# Altium PCB Pet_Tracker_main_board.PcbDoc
Units mil, origin at the board's own origin, x right, y up, seen from the top; angles counter-clockwise.
Board outline 1653.54 x 1771.65 mil, 4 copper layers (Top Layer, Mid Layer 1, Mid Layer 2, Bottom Layer), stack 23.756 mil thick; 49 components, 52 nets, 242 pads, 474 vias.
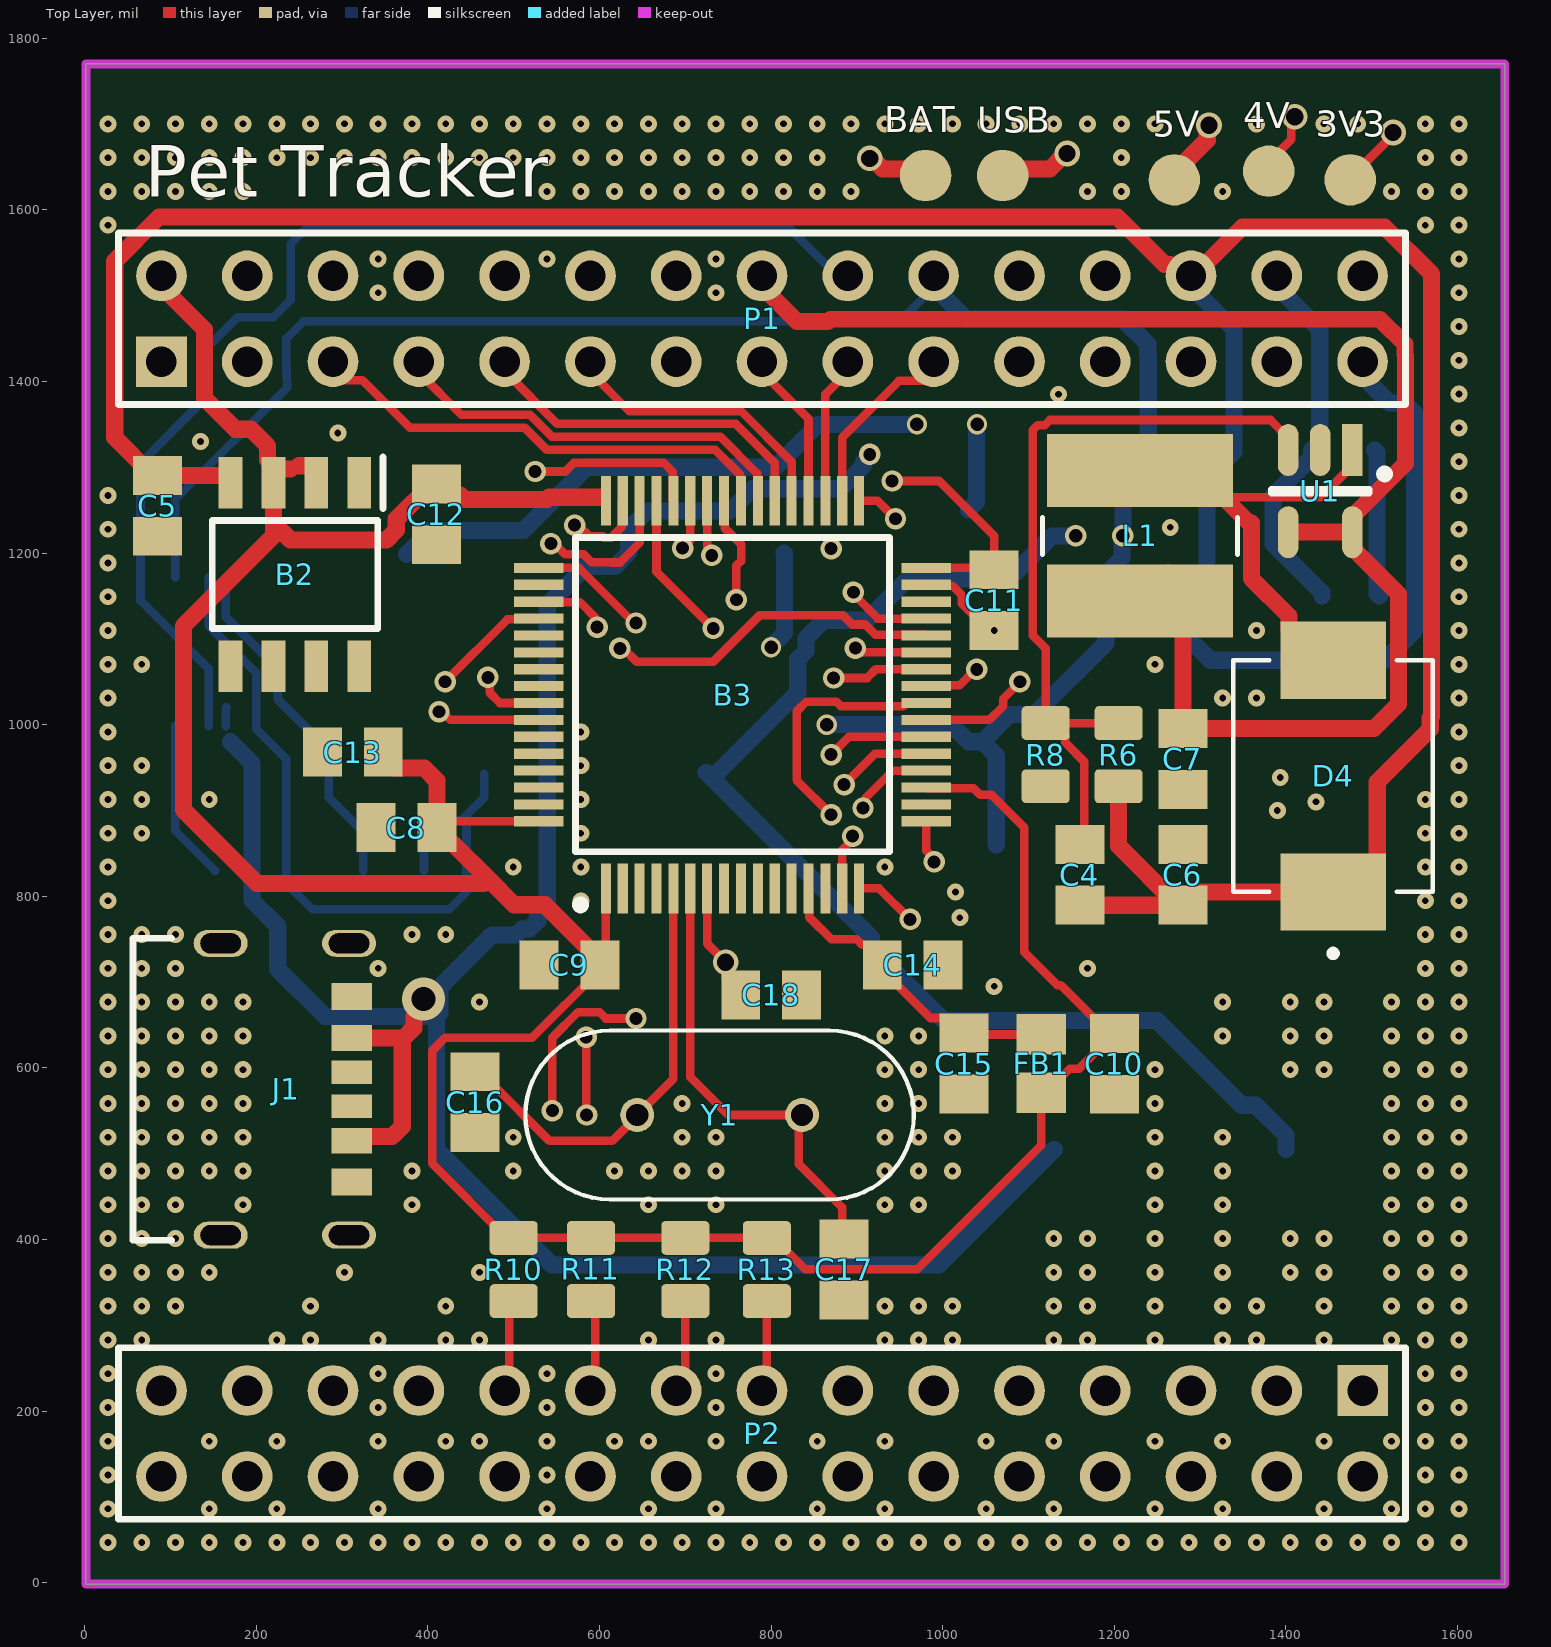
[diagram p0: Top Layer view]
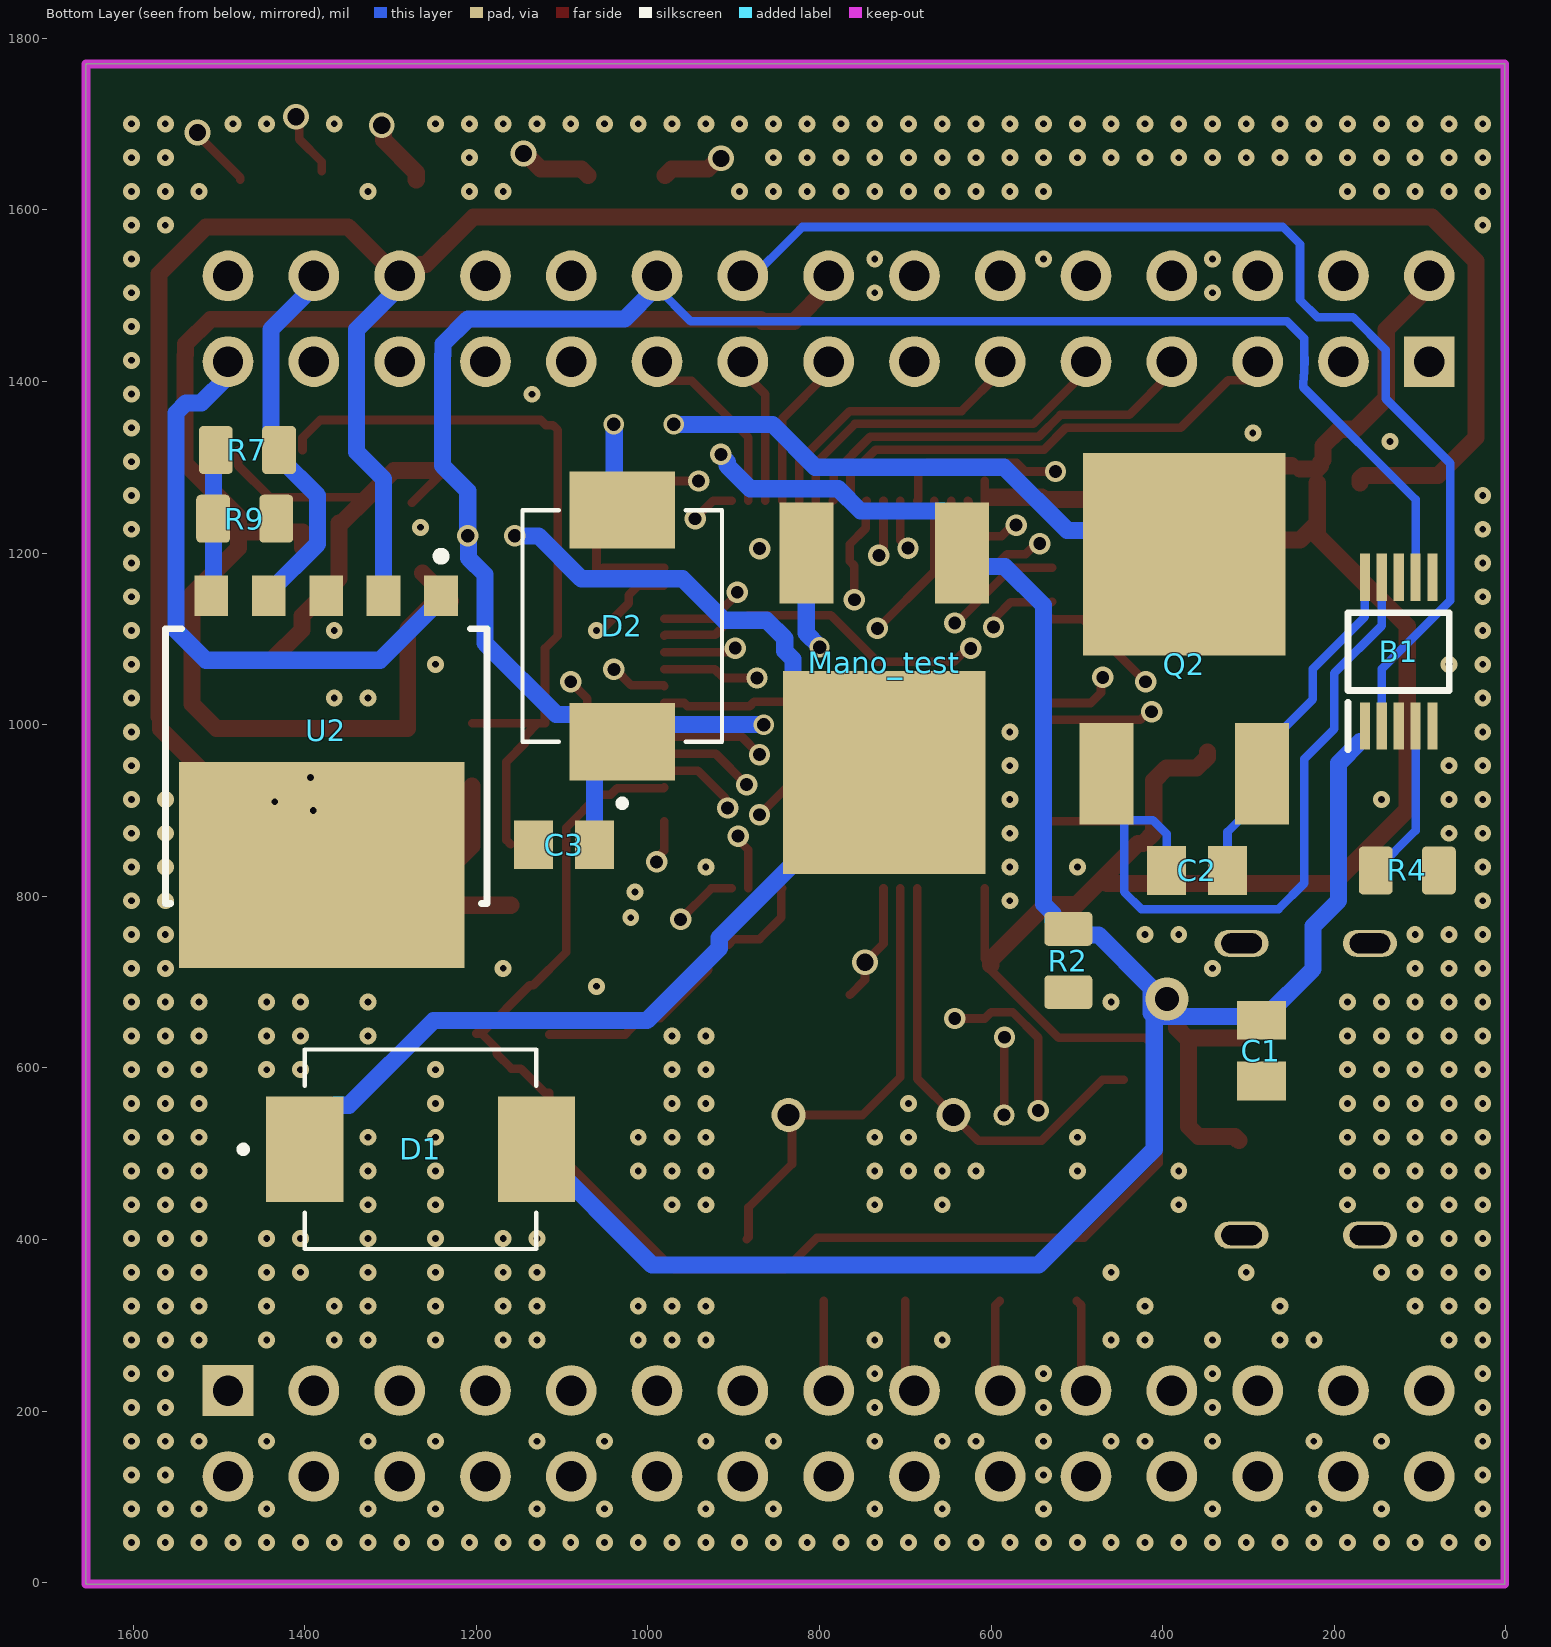
[diagram p1: Bottom Layer view, seen from below]
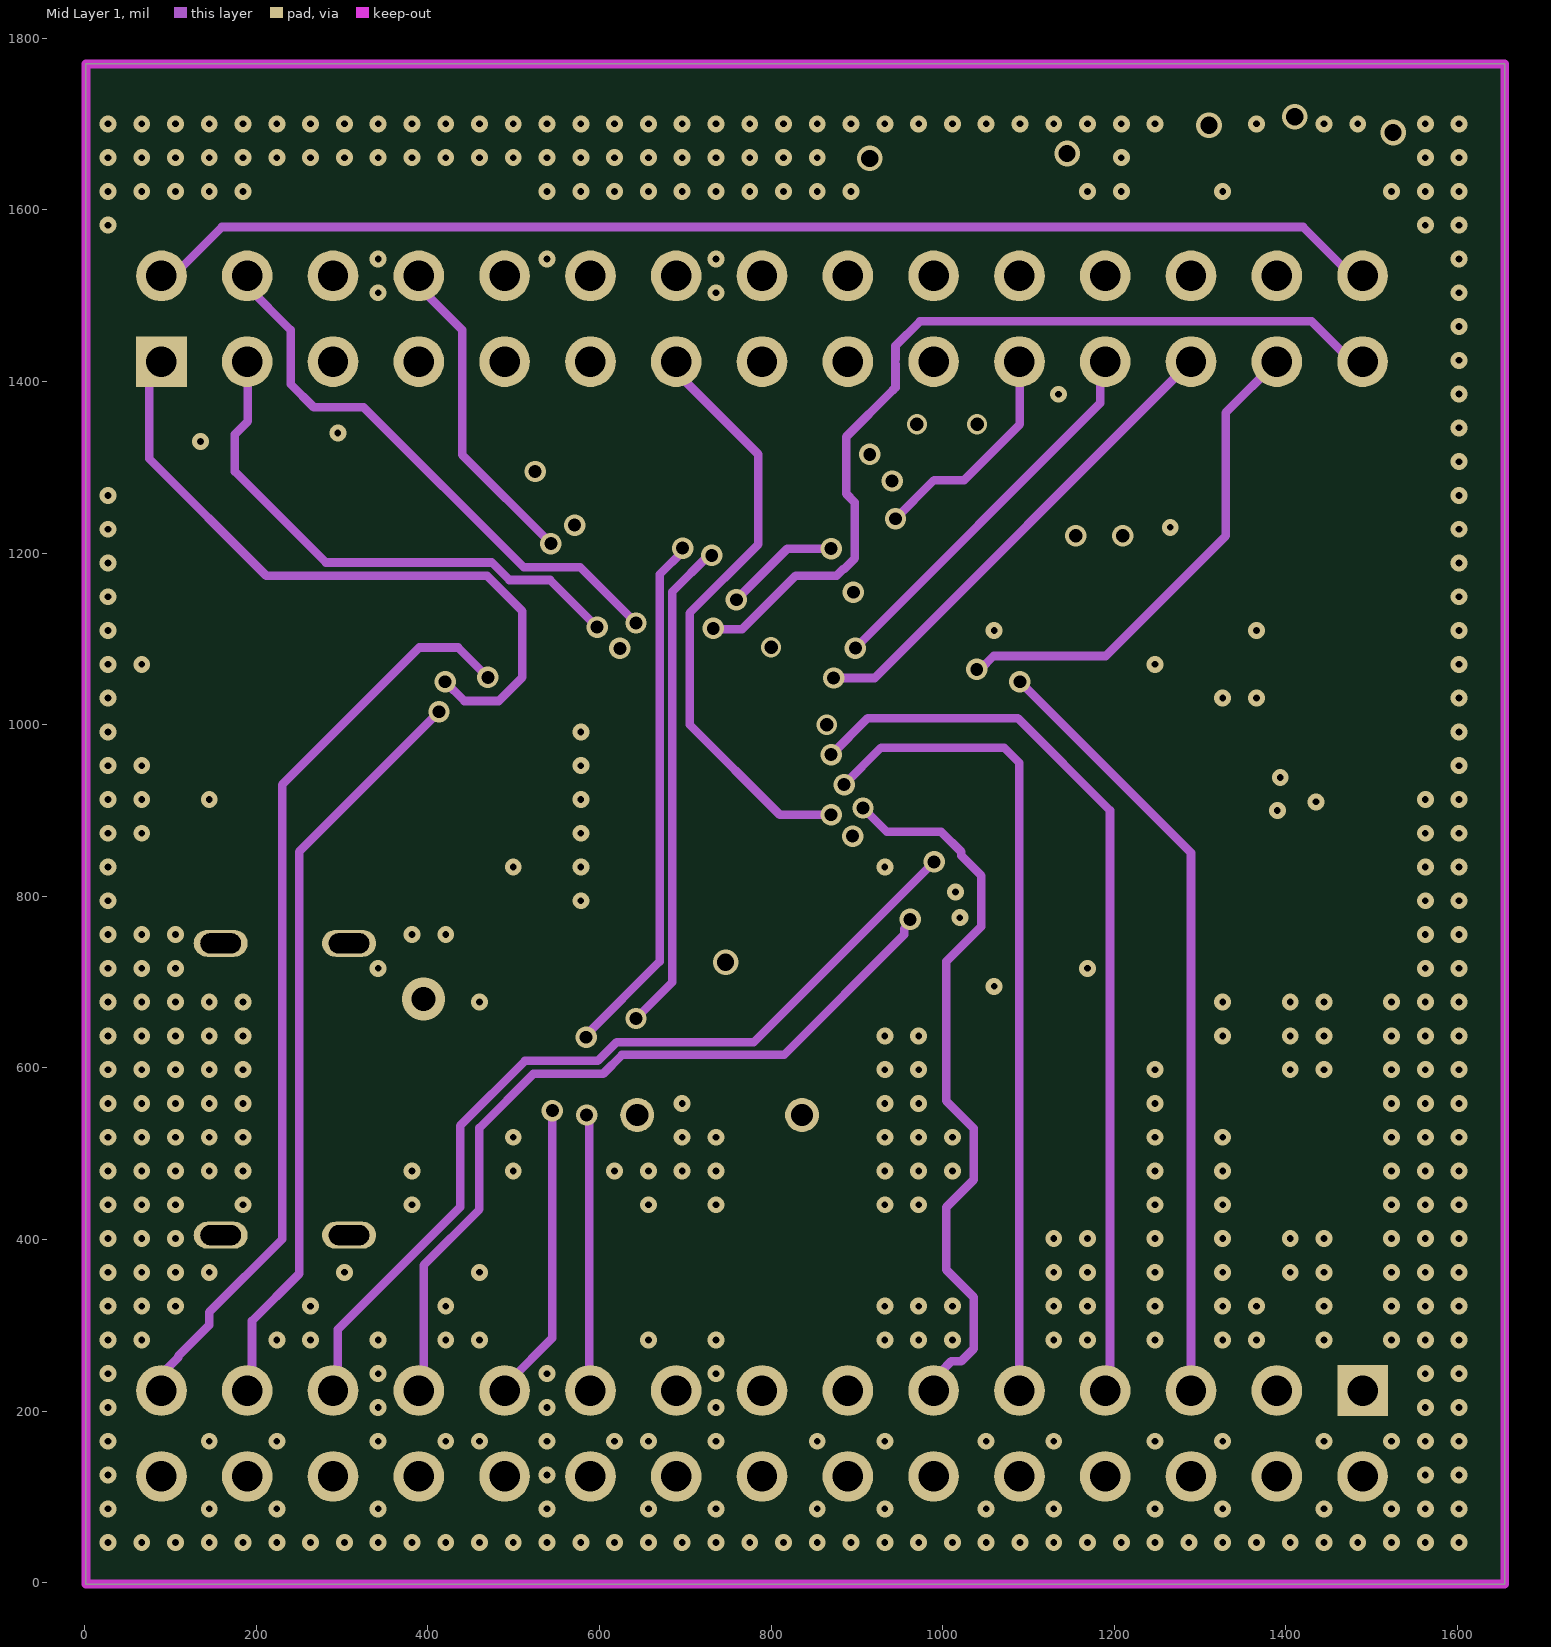
[diagram p2: Mid Layer 1]
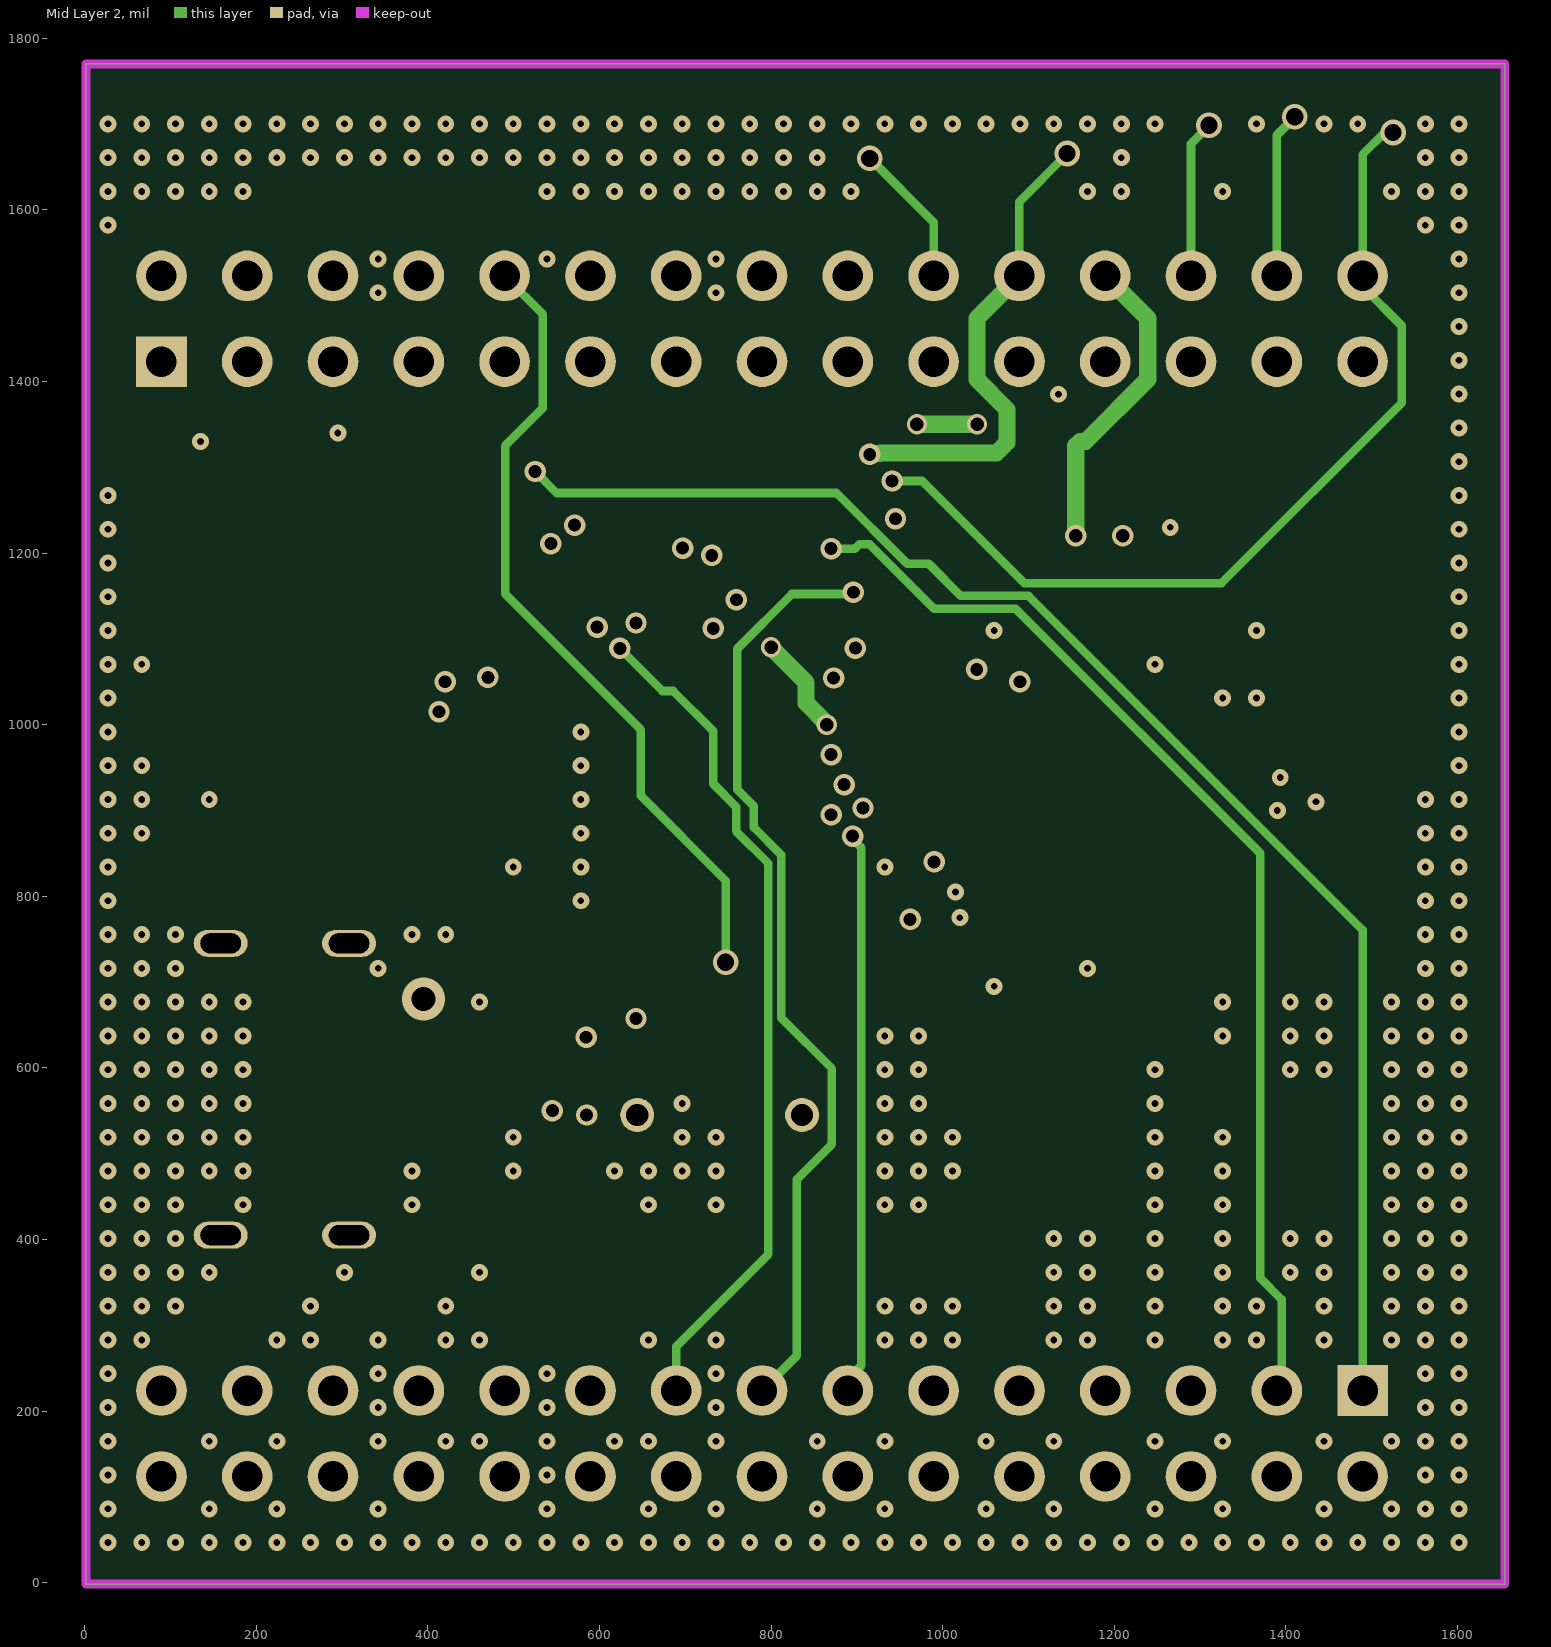
[diagram p3: Mid Layer 2]

## Layer stack, top to bottom
Top Solder: solder mask 0.4, Solder Resist, Dk 3.5
Top Layer: signal copper 1.4
Dielectric 1: prepreg 2.8, PP-006, Dk 4.1
Mid Layer 1: signal copper 1.378
Dielectric 2: prepreg 2.8, PP-006, Dk 4.1
Mid Layer 2: signal copper 1.378
Dielectric2: dielectric 12.6, FR-4, Dk 4.8
Bottom Layer: signal copper 1.4
Bottom Solder: solder mask 0.4, Solder Resist, Dk 3.5

## Board outline
1.46,-1.65 1.46,1770 1655,1770 1655,-1.65

## Design rules (kind name [scope] priority, off if disabled: settings)
AssemblyTestPointUsage [All] p0: scope1count=1 scope1_0_kind=Board scope1_0_value=Board scope2count=1 scope2_0_kind=Board scope2_0_value=Board commentlength=0
AssemblyTestpoint [All] p0: scope1count=1 scope1_0_kind=Board scope1_0_value=Board scope2count=1 scope2_0_kind=Board scope2_0_value=Board commentlength=0
Clearance [All] p0: scope1count=1 scope1_0_kind=Board scope1_0_value=Board scope2count=1 scope2_0_kind=Board scope2_0_value=Board commentlength=0 gap=10
Clearance [All] p1: gap=10 ignorepadtopadclearanceinfootprint=FALSE except(0: Arc-Hole Track-Hole SMDPad-Hole THPad-Hole Via-Hole Fill-Hole Poly-Hole Region-Hole Text-Hole; 5: Arc-Arc Arc-Track Arc-SMDPad Arc-Text Track-Track Track-SMDPad Track-Text SMDPad-SMDPad SMDPad-Text THPad-Text Via-Text Fill-Text Poly-Text Region-Text Text-Text)
ComponentClearance [All] p0: scope1count=1 scope1_0_kind=Board scope1_0_value=Board scope2count=1 scope2_0_kind=Board scope2_0_value=Board commentlength=0 gap=10 collisioncheckmode=3
DiffPairsRouting [All] p0: scope1count=1 scope1_0_kind=Board scope1_0_value=Board scope2count=1 scope2_0_kind=Board scope2_0_value=Board commentlength=0
FabricationTestPointUsage [All] p0: scope1count=1 scope1_0_kind=Board scope1_0_value=Board scope2count=1 scope2_0_kind=Board scope2_0_value=Board commentlength=0 valid=0 allowmultiple=FALSE
FabricationTestpoint [All] p0: scope1count=1 scope1_0_kind=Board scope1_0_value=Board scope2count=1 scope2_0_kind=Board scope2_0_value=Board commentlength=0 side=3 testpointundercomponent=TRUE minsize=40 maxsize=100 preferedsize=60 minholesize=0 maxholesize=40 preferedholesize=32 testpointgrid=1
FanoutControl Fanout_BGA [All] p0 off: scope1count=1 scope1_0_kind=Board scope1_0_value=Board scope2count=1 scope2_0_kind=Board scope2_0_value=Board commentlength=69 // Protel DXP Scope 1 Expression Was: IsBGA   Fanout_BGA (Default Rule)
FanoutControl Fanout_LCC [All] p0 off: scope1count=1 scope1_0_kind=Board scope1_0_value=Board scope2count=1 scope2_0_kind=Board scope2_0_value=Board commentlength=69 // Protel DXP Scope 1 Expression Was: IsLCC   Fanout_LCC (Default Rule)
FanoutControl Fanout_SOIC [All] p0 off: scope1count=1 scope1_0_kind=Board scope1_0_value=Board scope2count=1 scope2_0_kind=Board scope2_0_value=Board commentlength=71 // Protel DXP Scope 1 Expression Was: IsSOIC   Fanout_SOIC (Default Rule)
FanoutControl Fanout_Small [All] p0 off: scope1count=1 scope1_0_kind=Board scope1_0_value=Board scope2count=1 scope2_0_kind=Board scope2_0_value=Board commentlength=84 // Protel DXP Scope 1 Expression Was: (CompPinCount < 5)   Fanout_Small (Default Rule)
FanoutControl Fanout_Default [All] p0: scope1count=1 scope1_0_kind=Board scope1_0_value=Board scope2count=1 scope2_0_kind=Board scope2_0_value=Board commentlength=30 // Fanout_Default (Default Rule)
Height [All] p0: scope1count=1 scope1_0_kind=Board scope1_0_value=Board scope2count=1 scope2_0_kind=Board scope2_0_value=Board commentlength=0
HoleSize [All] p0: scope1count=1 scope1_0_kind=Board scope1_0_value=Board scope2count=1 scope2_0_kind=Board scope2_0_value=Board commentlength=0 absolutevalues=TRUE maxlimit=100 minlimit=1 maxpercent=80.000 minpercent=20.000
HoleToHoleClearance [All] p0: scope1count=1 scope1_0_kind=Board scope1_0_value=Board scope2count=1 scope2_0_kind=Board scope2_0_value=Board commentlength=0
LayerPairs [All] p0: scope1count=1 scope1_0_kind=Board scope1_0_value=Board scope2count=1 scope2_0_kind=Board scope2_0_value=Board commentlength=0 enforce=TRUE
MinimumSolderMaskSliver [All] p0: scope1count=1 scope1_0_kind=Board scope1_0_value=Board scope2count=1 scope2_0_kind=Board scope2_0_value=Board commentlength=0
MinimumSolderMaskSliver [All] p1: minsoldermaskwidth=1.5
NetAntennae [All] p0: scope1count=1 scope1_0_kind=Board scope1_0_value=Board scope2count=1 scope2_0_kind=Board scope2_0_value=Board commentlength=0
PasteMaskExpansion [All] p0: scope1count=1 scope1_0_kind=Board scope1_0_value=Board scope2count=1 scope2_0_kind=Board scope2_0_value=Board commentlength=0 expansion=0
PlaneClearance [All] p0: scope1count=1 scope1_0_kind=Board scope1_0_value=Board scope2count=1 scope2_0_kind=Board scope2_0_value=Board commentlength=0 clearance=20
PlaneConnect [All] p0: scope1count=1 scope1_0_kind=Board scope1_0_value=Board scope2count=1 scope2_0_kind=Board scope2_0_value=Board commentlength=0 planeconnectstyle=Relief reliefexpansion=10 reliefentries=4 reliefconductorwidth=5.91 reliefairgap=10
PlaneConnect [All] p1: pad.planeconnectstyle=Relief pad.reliefexpansion=10 pad.reliefentries=4 pad.reliefconductorwidth=5.91 pad.reliefairgap=10 via.planeconnectstyle=Relief via.reliefexpansion=20 via.reliefentries=4 via.reliefconductorwidth=10 via.reliefairgap=10
PolygonConnect PolygonConnect_1 [All] p0: scope1count=1 scope1_0_kind=Board scope1_0_value=Board scope2count=1 scope2_0_kind=Board scope2_0_value=Board commentlength=0 connectstyle=Relief reliefconductorwidth=10 reliefentries=4 polygonreliefangle="90 Angle"
PolygonConnect VIA_COnnect [All] p0 off: scope1count=1 scope1_0_kind=Board scope1_0_value=Board scope2count=1 scope2_0_kind=Net scope2_0_value=GND commentlength=44 connectstyle=Relief reliefconductorwidth=10 reliefentries=4 polygonreliefangle="90 Angle" // Protel DXP Scope 1 Expression Was: IsVia
PolygonConnect VIA_COnnect [IsVia vs InNet('GND')] p1: thpad.connectstyle=Relief thpad.reliefconductorwidth=10 thpad.reliefentries=4 thpad.polygonreliefangle="90 Angle" thpad.airgapwidth=10 smdpad.connectstyle=Relief smdpad.reliefconductorwidth=10 smdpad.reliefentries=4 smdpad.polygonreliefangle="90 Angle" smdpad.airgapwidth=10 via.connectstyle=Direct via.reliefconductorwidth=10 via.reliefentries=4 via.polygonreliefangle="90 Angle" via.airgapwidth=10
PolygonConnect PolygonConnect_1 [All] p2: thpad.connectstyle=Relief thpad.reliefconductorwidth=10 thpad.reliefentries=4 thpad.polygonreliefangle="90 Angle" thpad.airgapwidth=10 smdpad.connectstyle=Relief smdpad.reliefconductorwidth=5.91 smdpad.reliefentries=4 smdpad.polygonreliefangle="90 Angle" smdpad.airgapwidth=10 via.connectstyle=Relief via.reliefconductorwidth=10 via.reliefentries=4 via.polygonreliefangle="90 Angle" via.airgapwidth=10
RoutingCorners [All] p0: scope1count=1 scope1_0_kind=Board scope1_0_value=Board scope2count=1 scope2_0_kind=Board scope2_0_value=Board commentlength=0 cornerstyle=45-Degree minsetback=100 maxsetback=100
RoutingLayers [All] p0: scope1count=1 scope1_0_kind=Board scope1_0_value=Board scope2count=1 scope2_0_kind=Board scope2_0_value=Board commentlength=0 top layer=Automatic mid layer 1=Automatic mid layer 2=Automatic bottom layer=Automatic
RoutingPriority [All] p0: scope1count=1 scope1_0_kind=Board scope1_0_value=Board scope2count=1 scope2_0_kind=Board scope2_0_value=Board commentlength=0
RoutingTopology [All] p0: scope1count=1 scope1_0_kind=Board scope1_0_value=Board scope2count=1 scope2_0_kind=Board scope2_0_value=Board commentlength=0 topology=Shortest
RoutingVias [All] p0: scope1count=1 scope1_0_kind=Board scope1_0_value=Board scope2count=1 scope2_0_kind=Board scope2_0_value=Board commentlength=0 holewidth=28 width=50 viastyle="Through Hole" minholewidth=5.91 minwidth=9.84 maxholewidth=39.37 maxwidth=59.06
RoutingVias [All] p1: holewidth=28 width=50 viastyle="Through Hole" minholewidth=5.91 minwidth=9.84 maxholewidth=39.37 maxwidth=59.06
ShortCircuit [All] p0: scope1count=1 scope1_0_kind=Board scope1_0_value=Board scope2count=1 scope2_0_kind=Board scope2_0_value=Board commentlength=0 allowed=FALSE
SilkToBoardRegionClearance [All] p0: scope1count=1 scope1_0_kind=Board scope1_0_value=Board scope2count=1 scope2_0_kind=Board scope2_0_value=Board commentlength=0
SilkToSilkClearance [All] p0: scope1count=1 scope1_0_kind=Board scope1_0_value=Board scope2count=1 scope2_0_kind=Board scope2_0_value=Board commentlength=0
SilkToSolderMaskClearance [All] p0 off: scope1count=1 scope1_0_kind=Board scope1_0_value=Board scope2count=1 scope2_0_kind=Board scope2_0_value=Board commentlength=44 // Protel DXP Scope 1 Expression Was: IsPad
SilkToSolderMaskClearance [IsPad] p1: minsilkscreentomaskgap=5 clearancetoexposedcopper=TRUE
SolderMaskExpansion [All] p0: scope1count=1 scope1_0_kind=Board scope1_0_value=Board scope2count=1 scope2_0_kind=Board scope2_0_value=Board commentlength=0 expansion=1.5
SolderMaskExpansion [All] p1: expansion=1.5 istentingtop=FALSE
UnRoutedNet [All] p0: scope1count=1 scope1_0_kind=Board scope1_0_value=Board scope2count=1 scope2_0_kind=Board scope2_0_value=Board commentlength=0
UnpouredPolygon [All] p0: scope1count=1 scope1_0_kind=Board scope1_0_value=Board scope2count=1 scope2_0_kind=Board scope2_0_value=Board commentlength=0
Width [All] p0: scope1count=1 scope1_0_kind=Board scope1_0_value=Board scope2count=1 scope2_0_kind=Board scope2_0_value=Board commentlength=0 maxlimit=39.37 minlimit=10 preferedwidth=10
Width [All] p1: maxlimit=39.37 minlimit=10 preferedwidth=10
27 further rules are at their usual default settings.

## Classes and differential pairs
component class STM: B3 C8 C9 C10 C11 C12 C13 C14 C15 C16 C17 C18 FB1 P2 R10 R11 R12 R13 Y1
component class Power_Schematic: 3V3 4V 5V B1 B2 BAT C1 C2 C3 C4 C5 C6 C7 D1 D2 D4 J1 L1 Q2 R2 R4 R6 R7 R8 R9 U1 U2 USB

## Components (designator, comment, footprint, x,y, rotation, side; value= is the part's Value field where it differs from the comment)
3V3 "T_P_3V3" T_P 1475,1635 r90 top net-tie (schematic designator TP_3V3)
4V "T_P_4V" T_P 1380,1645 r180 top net-tie (schematic designator TP_4V)
5V "T_P_5V" T_P 1270,1635 r180 top net-tie (schematic designator TP_5V)
B1 "MAX1898EUB42+" MAX1898EUB42 125,1085 r90 bottom
B2 "MC33269D-3.3G" 3V3Voltage_MC33269D-3.3G 245,1175 r270 top
B3 "STM32L433RCT6P" STM32L433RCT6P 755,1035 r90 top
BAT "T_P_V_BAT" T_P 980,1640 r90 top net-tie (schematic designator TP_V_BAT?)
C1 "10uF" CAP_0805 285,620 r90 bottom
C2 "100nF" CAP_0805 360,830 r180 bottom
C3 "10uF" CAP_0805 1097.8,860 r180 bottom
C4 "4.7nF" CAP_0805 1160,825 r270 top
C5 "330nF" CAP_0805 85,1255 r90 top
C6 "10uF" CAP_0805 1280,825 r270 top
C7 "10uF" CAP_0805 1280,960 r90 top
C8 "100nF" CAP_0805 375,880 r0 top
C9 "100nF" CAP_0805 565,720 r0 top
C10 "100nF" CAP_0805 1200,604.57 r90 top
C11 "100nF" CAP_0805 1060,1145 r90 top
C12 "100nF" CAP_0805 410,1245 r90 top
C13 "1uF" CAP_0805 312.52,967.95 r0 top
C14 "1uF" CAP_0805 965,720 r180 top
C15 "10nF" CAP_0805 1025,605 r90 top
C16 "27pF" CAP_0805 455,560 r270 top
C17 "27pF" CAP_0805 885,365 r90 top
C18 "100nF" CAP_0805 800,685 r180 top
D1 "SS32" POWER_SCHOTKY_3A 1265,505 r180 bottom
D2 "SS32" POWER_SCHOTKY_3A 1030,1115.04 r90 bottom
D4 "SS32" POWER_SCHOTKY_3A 1455,940 r90 top
FB1 "120R" FER_BEAD_0805 1115,605 r90 top
J1 "POWER_USB" POWER_USB_C 190,575 r270 top
L1 "10uH" MCSD54-4R7MU 1230,1220 r270 top
Mano_test "MOSFET Pch -45V -4.5A" P_CHANNEL_POWER_RD3H045SPTL1 724.45,1032.68 r0 bottom
P1 "Header 15X2" HDR2X15 89.41,1423.03 r0 top
P2 "Header 15X2" HDR2X15 1489.41,223.82 r180 top
Q2 "MOSFET Pch -45V -4.5A" P_CHANNEL_POWER_RD3H045SPTL1 375,1110 r180 bottom
R2 "100k" RES_0805 510,725 r90 bottom
R4 "750" RES_0805 115,830 r180 bottom
R6 "100k" RES_0805 1205,965 r270 top
R7 "5.1k" RES_0805 1466.81,1320 r180 bottom
R8 "33k" RES_0805 1120,965 r90 top
R9 "2.2k" RES_0805 1470,1240 r0 bottom
R10 "4K7" RES_0805 500,365 r90 top
R11 "4K7" RES_0805 590,365 r90 top
R12 "4K7" RES_0805 700,365 r90 top
R13 "4K7" RES_0805 795,365 r90 top
U1 "Switch Voltage Regulator MIC2250-1YD5-TR" Switching_MIC2250-1YD5-TR 1440,1272.15 r270 top
U2 "1.24V-5V MIC37252WR" 1V24_5V_MIC37252WR 1375,961.61 r0 bottom
USB "T_P_USB" T_P 1070,1640 r90 top net-tie (schematic designator TP_USB)
Y1 "16MHZ_TL" 16MHZ_TL 740,545 r180 top

## Footprints (in the part's own frame and the unit in brackets; to place one, negate y for a bottom-side part, rotate by r counter-clockwise, add the part's x,y. Pads: shape width x height; smd on the part's side, far side on the other; paste and mask are expansions set on the pad)
1V24_5V_MIC37252WR [mm]
  rect 1x1.2 smd paste+0 mask+0: 1(-3.4,-4.785) 2(-1.7,-4.785) 3(0,-4.785) 4(1.7,-4.785) 5(3.4,-4.785)
  rect 8.45x6.096 smd paste-1000 mask+0: 6(0.127,3.175)
  silkscreen extent -4.76,-6.08 4.76,4.32
3V3Voltage_MC33269D-3.3G [mm]
  rect 1.525x0.7 smd: 1(-2.712,1.905) 2(-2.712,0.635) 3(-2.712,-0.635) 4(-2.712,-1.905) 5(2.712,-1.905) 6(2.712,-0.635) 7(2.712,0.635) 8(2.712,1.905)
  silkscreen extent -3.47,-2.45 1.6,2.61
16MHZ_TL [mm]
  round 1.007 hole 0.657: 1(-2.44,0) 2(2.44,0)
  silkscreen extent -5.75,-2.5 5.75,2.5
CAP_0805 [mm]
  rect 1.15x1.45 smd: 1(-0.9,0) 2(0.9,0)
FER_BEAD_0805 [mm]
  rect 1.2x1.47 smd: 1(-0.86,0) 2(0.86,0)
HDR2X15 [mm] "Connector; Header; 15x2 Position"
  rect 1.5x1.5 hole 0.9: 1(0,0)
  round 1.5 hole 0.9: 2(0,2.54) 3(2.54,0) 4(2.54,2.54) 5(5.08,0) 6(5.08,2.54) 7(7.62,0) 8(7.62,2.54) 9(10.16,0) 10(10.16,2.54) 11(12.7,0) 12(12.7,2.54) 13(15.24,0) 14(15.24,2.54) 15(17.78,0) 16(17.78,2.54) 17(20.32,0) 18(20.32,2.54) 19(22.86,0) 20(22.86,2.54) 21(25.4,0) 22(25.4,2.54) 23(27.94,0) 24(27.94,2.54) 25(30.48,0) 26(30.48,2.54) 27(33.02,0) 28(33.02,2.54) 29(35.56,0) 30(35.56,2.54)
  silkscreen extent -1.27,-1.27 36.83,3.81
MAX1898EUB42 [mm]
  rect 1.4x0.3 smd: 1(-2.2,1) 2(-2.2,0.5) 3(-2.2,0) 4(-2.2,-0.5) 5(-2.2,-1) 6(2.2,-1) 7(2.2,-0.5) 8(2.2,0) 9(2.2,0.5) 10(2.2,1)
  silkscreen extent -2.9,-1.5 1.15,1.5
MCSD54-4R7MU [mil]
  rect 85x217 smd paste+0 mask+0: 1(-76,0) 2(76,0)
  silkscreen extent -21,-114 21,114
P_CHANNEL_POWER_RD3H045SPTL1 [mm]
  rect 1.6x3 smd: 1(-2.3,-4.25) 3(2.3,-4.25)
  rect 6x6 smd: 2(0,2.25)
POWER_SCHOTKY_3A [mm]
  rect 2.29x3.12 smd: A(3.43,0) C(-3.43,0)
  silkscreen extent -5.35,-2.95 3.43,2.95
POWER_USB_C [mm]
  rect 0.7x1.2 smd: A5(-0.5,3.08) B5(0.5,3.08)
  rect 0.76x1.2 smd: A9(1.52,3.08) B9(-1.52,3.08)
  rect 0.8x1.2 smd: A12(2.75,3.08) B12(-2.75,3.08)
  oval 0.8x1.6 hole 0.6 slot 1.2 at 90 deg mask+0: S1(-4.32,3) S2(4.32,3) S3(-4.32,-0.8) S4(4.32,-0.8)
  silkscreen extent -4.47,-3.4 4.47,-2.25
RES_0805 [mm]
  rrect25% 1x1.42 smd: 1(-0.935,0) 2(0.935,0)
STM32L433RCT6P [mm]
  rect 1.475x0.3 smd: 1(-5.738,3.75) 2(-5.738,3.25) 3(-5.738,2.75) 4(-5.738,2.25) 5(-5.738,1.75) 6(-5.738,1.25) 7(-5.738,0.75) 8(-5.738,0.25) 9(-5.738,-0.25) 10(-5.738,-0.75) 11(-5.738,-1.25) 12(-5.738,-1.75) 13(-5.738,-2.25) 14(-5.738,-2.75) 15(-5.738,-3.25) 16(-5.738,-3.75) 33(5.738,-3.75) 34(5.738,-3.25) 35(5.738,-2.75) 36(5.738,-2.25) 37(5.738,-1.75) 38(5.738,-1.25) 39(5.738,-0.75) 40(5.738,-0.25) 41(5.738,0.25) 42(5.738,0.75) 43(5.738,1.25) 44(5.738,1.75) 45(5.738,2.25) 46(5.738,2.75) 47(5.738,3.25) 48(5.738,3.75)
  rect 0.3x1.475 smd: 17(-3.75,-5.738) 18(-3.25,-5.738) 19(-2.75,-5.738) 20(-2.25,-5.738) 21(-1.75,-5.738) 22(-1.25,-5.738) 23(-0.75,-5.738) 24(-0.25,-5.738) 25(0.25,-5.738) 26(0.75,-5.738) 27(1.25,-5.738) 28(1.75,-5.738) 29(2.25,-5.738) 30(2.75,-5.738) 31(3.25,-5.738) 32(3.75,-5.738) 49(3.75,5.738) 50(3.25,5.738) 51(2.75,5.738) 52(2.25,5.738) 53(1.75,5.738) 54(1.25,5.738) 55(0.75,5.738) 56(0.25,5.738) 57(-0.25,5.738) 58(-0.75,5.738) 59(-1.25,5.738) 60(-1.75,5.738) 61(-2.25,5.738) 62(-2.75,5.738) 63(-3.25,5.738) 64(-3.75,5.738)
  silkscreen extent -6.35,-4.65 4.65,4.65
Switching_MIC2250-1YD5-TR [mm]
  rect 1.54x0.612 smd paste+0 mask+0: 1(-1.216,0.95)
  rrect100% 1.54x0.612 smd paste+0 mask+0: 2(-1.216,0) 3(-1.216,-0.95) 4(1.216,-0.95) 5(1.216,0.95)
  silkscreen extent -0.63,-1.45 0.05,2.03
T_P [mil]
  round 60 smd: 1(0,0)

## Part data
3V3 4V 5V BAT USB: library part T_P, "Test_point"
B1: "Part: MAX1898EUB42+ BATT CHARGER, LI-ION, 4.2V"
B2: library part LDO3V3, "Voltage regulator,Part: MC33269D-3.3G, Low Dropout Voltage Regulator, 0.8A 3.3"
B3: "ARM Cortex-M4 MCU 80 MHz with 256 Kbyte"
C1 C2 C3 C4 C5 C6 C7 C8 C9 C10 C11 C12 C13 C14 C15 C16 C17 C18: library part SMT_CAP
D1 D2 D4: library part POWER_SCHOTKY_3A, "Part: SS32"
FB1: library part SMT_FER_BEAD, "1 kOhms @ 100MHz 1 1.5A 150mOhm"
J1: "USB_C_ONLY_POWER /  /  / https://lt.farnell.com/gct-global-connector-technology/usb4125-gf-a/usb-conn-2-0-type-c-r-a-rcpt-6pos/dp/3648642"
L1: library part IND, "Part: MCSD54-4R7MU"
Mano_test Q2: library part "P_CHANNEL_POWER 4.5A RD3H045SPTL1", "Part: RD3H045SPTL1"
P1 P2: "Header, 15-Pin, Dual row"
R2 R4 R6 R7 R8 R9 R10 R11 R12 R13: library part SMT_RES
U1: "Part: MIC2250-1YD5-TR / 2.5V to 5.5 V input  / 1.24V to 32V output"
U2: "Part: MIC37252WR"
Y1: "16MHz ±30ppm Crystal 18pF 40 Ohms HC-49/US"

## Via types
v1: diameter 19.68, hole 7.87, Top Layer to Bottom Layer, tented both sides, 424 vias
v2: diameter 25, hole 15, Top Layer to Bottom Layer, tented both sides, 33 vias
v3: diameter 30, hole 20, Top Layer to Bottom Layer, tented both sides, 6 vias
v4: diameter 23.62, hole 15.75, Top Layer to Bottom Layer, tented both sides, 4 vias
v5: diameter 19.68, hole 7.87, Top Layer to Bottom Layer, tented top, 3 vias
v6: diameter 25, hole 15.75, Top Layer to Bottom Layer, tented top, 2 vias
v7: diameter 19.68, hole 7.87, Top Layer to Bottom Layer, tented bottom, 1 vias
v8: diameter 50, hole 28, Top Layer to Bottom Layer, tented both sides, 1 vias

## Nets (pads, with @x,y where several pads share a name; then routed paths per layer and width w, separated by ;. In a path a pad name is that pad's centre, name@x,y a point inside that pad or via, vN(x,y) a via of type N, cw(c..) or ccw(c..) an arc to the next point about the centre after c; other vN are vias at no path point)
3V3: 3V3.1 B2.2 B2.3 B3.1 B3.19 B3.32 B3.48 B3.64 C8.2 C9.2 C10.2 C11.2 C12.2 C13.2 FB1.1 P1.2 P1.30 R10.2 R11.2 R12.2 R13.2 | length 6868.9
  Top Layer w10: C8.2 417.8,887.36 B3.64 ; B3.1 607.36,726.93 C9.2 600.43,714.09 521.34,635 420,635 405,620 405,488.54 491.73,401.81 R10.2 R11.2 R12.2 R13.2 803.27,401.81 840.08,365 970,365 1115,510 FB1.1 1120.31,571.14 1148.25,599.08 1159.08,599.08 1176.46,616.46 1176.46,622.36 C10.2@1194.09,640 ; B3.48 B3.48@607.36,1284.04 ; v2(941.04,1283.96) 996.04,1283.96 1060,1220 C11.2 1054.09,1180.43 1051.89,1182.64 B3.32 ; B3.19 981.81,925.83 1035.97,925.83 1043.57,918.22 1056.78,918.22 1095,880 1095,735 1133.68,696.32 1137.78,696.32 C10.2@1194.09,640 ; C10.2 C10.2@1194.09,640 ; 3V3.1 1475,1637.5 1525,1687.5 v3(1525,1690)
  Top Layer w20: P1.2@90,1510 139.53,1460.47 139.53,1380.47 175.78,1344.22 193.79,1344.22 213.12,1324.89 213.12,1308.67 216.22,1305.57 216.22,1301.79 220,1298.01 240,1298.01 ; B2.3 220,1235 ; 249.98,1301.79 266.22,1301.79 270,1298.01 B2.2 ; C13.2 347.95,962.05 360.59,949.41 395.76,949.41 410.43,934.74 C8.2@410.43,887.36 ; C8.2 410.43,874.09 423.07,861.46 428.98,861.46 470.22,820.22 ; 600,1265 540.96,1265 538.46,1262.5 442.76,1262.5 437.46,1267.8 422.64,1267.8 C12.2 404.09,1280.43 363.17,1239.51 363.17,1226.72 351.46,1215 240,1215 220,1235 ; C9.2 600.43,725.91 536.34,790 500.43,790 470.22,820.22 ; 220,1235 220,1220 115,1115 115,900.75 200.75,815 465,815 470.22,820.22
  Mid Layer 1 w10: P1.2@90,1510 160,1580 1420,1580 P1.30@1490,1510
  Mid Layer 2 w10: v2(941.04,1283.96) 976.04,1283.96 1095,1165 1325,1165 1535,1375 1535,1465 P1.30@1490,1510 ; P1.30 1489.41,1664.41 1515.86,1690.86 1524.14,1690.86 v3(1525,1690)
3V3A: B3.13 C14.2 C15.2 FB1.2 | length 368
  Top Layer w10: B3.13 844.49,808.19 844.49,775.51 870,750 899.57,750 906.02,743.54 911.93,743.54 929.57,725.91 C14.2 929.57,714.09 985.59,658.07 1007.36,658.07 C15.2 1026.57,638.86 FB1.2
4V: 4V.1 P1.28 R7.2 U2.4 | length 696.9
  Top Layer w10: 4V.1 1380,1655.8 1406.42,1682.22 1406.42,1704.72 v3(1410.25,1708.55)
  Mid Layer 2 w10: P1.28 1389.41,1686.96 1410.25,1707.8 v3(1410.25,1708.55)
  Bottom Layer w20: P1.28@1390,1510 1439.53,1460.47 1439.53,1329.53 R7.2 1430,1311.73 1385,1266.73 1385,1210.87 1441.93,1153.94 U2.4
5V: 5V.1 B2.4 C4.2 C5.2 C6.2 D4.C P1.26 R6.2 U2.2 | length 3902.1
  Top Layer w20: B2.4 170,1286.65 166.22,1290.43 79.09,1290.43 35,1334.53 35,1540.04 86.57,1591.62 1179.22,1591.62 1203.38,1591.62 1258.6,1536.4 1265.47,1536.4 1281.3,1520.57 1290,1520.57 1349.43,1580 1515,1580 1569.84,1525.16 1569.84,1009.71 1568.23,1008.1 1568.23,995 1506.42,933.19 1506.42,840.04 1471.34,804.96 D4.C 1301.3,804.96 1285.91,789.57 C6.2 C6.2@1274.09,789.57 ; C4.2 C6.2@1274.09,789.57 ; R6.2 1205,858.66 C6.2@1274.09,789.57 ; 5V.1 1270,1643.19 1308.33,1681.52 1308.33,1696.64 v3(1310.25,1698.55)
  Mid Layer 2 w10: P1.26 1289.41,1676.96 1310.25,1697.8 v3(1310.25,1698.55)
  Bottom Layer w20: P1.26@1290,1510 1339.53,1460.47 1339.53,1317.65 1308.07,1286.19 U2.2
5V_UNREGULATED: D1.C Mano_test.2 P1.24 | length 1808.6
  Mid Layer 2 w20: v6(1155,1220) 1155,1325 1160,1330 1166.42,1330 1238.94,1402.52 1238.94,1473.5 P1.24
  Bottom Layer w20: Mano_test.2 916.99,751.56 916.99,739.43 1001.42,655 1250.04,655 1348.62,556.42 1364.96,556.42 1400.04,521.34 D1.C ; Mano_test.2@731.06,937.49 831.03,1037.45 831.03,1076.16 840.55,1085.68 840.55,1100.55 861.73,1121.73 911.34,1121.73 959.61,1170 1077.63,1170 1127.63,1220 v6(1155,1220)
5V_USB_CHRG: B1.1 C1.2 D1.A J1.A9 J1.B9 Mano_test.1 P1.22 R2.2 USB.1 | length 3456.7
  Top Layer w20: J1.A9 316.1,520 358.28,520 370,531.72 370,632.95 371.89,634.84 ; J1.B9 371.89,634.84 ; v8(395,680) 395,671.88 383.61,660.49 383.61,646.56 371.89,634.84 ; USB.1 1077.65,1647.65 1124.95,1647.65 1142.29,1665 v3@1145,1665
  Mid Layer 2 w10: P1.22 1089.41,1609.41 v3@1145,1665
  Mid Layer 2 w20: v2(915,1315) 915.96,1315.96 927.07,1315.96 927.57,1316.46 1062.57,1316.46 1075,1328.89 1075,1367.4 1039.88,1402.52 1039.88,1473.5 P1.22
  Bottom Layer w10: B1.1 164.37,1019.09 B1.1@165.28,1020
  Bottom Layer w20: B1.1@170,980 195,955 195,795 225,765 225,715 280,660 410,660 ; v2(915,1315) 915,1313.65 907.58,1306.22 907.58,1301.82 880.75,1275 778.24,1275 752.29,1249.05 655.4,1249.05 633.9,1227.56 Mano_test.1 618.02,1184.12 584.12,1184.12 539.06,1139.06 539.06,790.87 527.95,779.76 527.95,771.5 518.27,761.81 R2.2 503.19,755 475,755 413.89,693.89 413.89,663.89 410,660 ; D1.A 994.96,370 545,370 410,505 410,660
  other v3: 1145,1665.75
CHARGE_LED_CATH: B1.2 P1.18 | length 1378.8
  Bottom Layer w10: B1.2 144.68,1064.95 65,1144.64 65,1304.73 140,1379.73 140,1436.59 178.41,1475 220,1475 240,1495 240,1560 260,1580 820,1580 822.93,1577.07 P1.18@890,1510
GND: B1.5 B1.6 B1.8 B2.1 B3.12 B3.18 B3.31 B3.47 B3.59 B3.63 C1.1 C3.1 C5.1 C6.1 C7.1 C8.1 C9.1 C10.1 C11.1 C12.1 C13.1 C14.1 C15.1 C16.2 C17.1 C18.1 J1.A12 J1.B12 J1.S1 J1.S2 J1.S3 J1.S4 P1.6 P1.12 P1.14 R2.1 R4.2 R8.1 R9.1 U1.2 U2.3 U2.6 | length 203.9
  Top Layer w10: v2(571,1232.5) 575.06,1232.5 587.93,1219.63 603.55,1219.63 605.22,1217.96 613.5,1217.96 626.14,1230.6 626.14,1260 B3.47 ; B3.31 981.81,1162.05 1011.21,1162.05 1022.31,1150.94 1022.31,1141.35 1054.09,1109.57 v7(1060,1109.57)
  other v1: 27.05,46.65 66.42,46.65 105.79,46.65 145.16,46.65 184.53,46.65 223.9,46.65 263.27,46.65 302.64,46.65 342.01,46.65 381.38,46.65 420.75,46.65 460.12,46.65 499.49,46.65 538.86,46.65 578.23,46.65 617.6,46.65 656.97,46.65 696.34,46.65 735.71,46.65 775.08,46.65 814.45,46.65 853.82,46.65 893.19,46.65 932.56,46.65 971.93,46.65 1011.3,46.65 1050.67,46.65 1090.04,46.65 1129.41,46.65 1168.78,46.65 1208.15,46.65 1247.52,46.65 1286.89,46.65 1326.26,46.65 1365.63,46.65 1405,46.65 1444.37,46.65 1483.74,46.65 1523.11,46.65 1562.48,46.65 1601.85,46.65 27.05,86.02 145.16,86.02 223.9,86.02 342.01,86.02 538.86,86.02 656.97,86.02 735.71,86.02 853.82,86.02 932.56,86.02 1050.67,86.02 1129.41,86.02 1247.52,86.02 1326.26,86.02 1444.37,86.02 1523.11,86.02 1562.48,86.02 1601.85,86.02 27.05,125.39 538.86,125.39 1562.48,125.39 1601.85,125.39 27.05,164.76 145.16,164.76 223.9,164.76 342.01,164.76 420.75,164.76 460.12,164.76 538.86,164.76 617.6,164.76 656.97,164.76 735.71,164.76 853.82,164.76 932.56,164.76 1050.67,164.76 1129.41,164.76 1247.52,164.76 1326.26,164.76 1444.37,164.76 1523.11,164.76 1562.48,164.76 1601.85,164.76 27.05,204.13 342.01,204.13 538.86,204.13 735.71,204.13 1562.48,204.13 1601.85,204.13 27.05,243.51 342.01,243.51 538.86,243.51 735.71,243.51 1562.48,243.51 1601.85,243.51 27.05,282.88 66.42,282.88 223.9,282.88 263.27,282.88 342.01,282.88 420.75,282.88 460.12,282.88 656.97,282.88 735.71,282.88 932.56,282.88 971.93,282.88 1011.3,282.88 1129.41,282.88 1168.78,282.88 1247.52,282.88 1326.26,282.88 1365.63,282.88 1444.37,282.88 1523.11,282.88 1562.48,282.88 1601.85,282.88 27.05,322.25 66.42,322.25 105.79,322.25 263.27,322.25 420.75,322.25 932.56,322.25 971.93,322.25 1011.3,322.25 1129.41,322.25 1168.78,322.25 1247.52,322.25 1326.26,322.25 1365.63,322.25 1444.37,322.25 1523.11,322.25 1562.48,322.25 1601.85,322.25 27.05,361.62 66.42,361.62 105.79,361.62 145.16,361.62 302.64,361.62 460.12,361.62 1129.41,361.62 1168.78,361.62 1247.52,361.62 1326.26,361.62 1405,361.62 1444.37,361.62 1523.11,361.62 1562.48,361.62 1601.85,361.62 27.05,400.99 66.42,400.99 105.79,400.99 1129.41,400.99 1168.78,400.99 1247.52,400.99 1326.26,400.99 1405,400.99 1444.37,400.99 1523.11,400.99 1562.48,400.99 1601.85,400.99 27.05,440.36 66.42,440.36 105.79,440.36 184.53,440.36 381.38,440.36 656.97,440.36 735.71,440.36 932.56,440.36 971.93,440.36 1247.52,440.36 1326.26,440.36 1523.11,440.36 1562.48,440.36 1601.85,440.36 27.05,479.73 66.42,479.73 105.79,479.73 145.16,479.73 184.53,479.73 381.38,479.73 499.49,479.73 617.6,479.73 656.97,479.73 696.34,479.73 735.71,479.73 932.56,479.73 971.93,479.73 1011.3,479.73 1247.52,479.73 1326.26,479.73 1523.11,479.73 1562.48,479.73 1601.85,479.73 27.05,519.1 66.42,519.1 105.79,519.1 145.16,519.1 184.53,519.1 499.49,519.1 696.34,519.1 735.71,519.1 932.56,519.1 971.93,519.1 1011.3,519.1 1247.52,519.1 1326.26,519.1 1523.11,519.1 1562.48,519.1 1601.85,519.1 27.05,558.47 66.42,558.47 105.79,558.47 145.16,558.47 184.53,558.47 696.34,558.47 932.56,558.47 971.93,558.47 1247.52,558.47 1523.11,558.47 1562.48,558.47 1601.85,558.47 27.05,597.84 66.42,597.84 105.79,597.84 145.16,597.84 184.53,597.84 932.56,597.84 971.93,597.84 1247.52,597.84 1405,597.84 1444.37,597.84 1523.11,597.84 1562.48,597.84 1601.85,597.84 27.05,637.21 66.42,637.21 105.79,637.21 145.16,637.21 184.53,637.21 932.56,637.21 971.93,637.21 1326.26,637.21 1405,637.21 1444.37,637.21 1523.11,637.21 1562.48,637.21 1601.85,637.21 27.05,676.58 66.42,676.58 105.79,676.58 145.16,676.58 184.53,676.58 460.12,676.58 1326.26,676.58 1405,676.58 1444.37,676.58 1523.11,676.58 1562.48,676.58 1601.85,676.58 1060,695 27.05,715.95 66.42,715.95 105.79,715.95 342.01,715.95 1168.78,715.95 1562.48,715.95 1601.85,715.95 27.05,755.32 66.42,755.32 105.79,755.32 381.38,755.32 420.75,755.32 1562.48,755.32 1601.85,755.32 1020,775 27.05,794.69 578.23,794.69 1562.48,794.69 1601.85,794.69 1015,805 27.05,834.06 499.49,834.06 578.23,834.06 932.56,834.06 1562.48,834.06 1601.85,834.06 27.05,873.43 66.42,873.43 578.23,873.43 1562.48,873.43 1601.85,873.43 27.05,912.8 66.42,912.8 145.16,912.8 578.23,912.8 1562.48,912.8 1601.85,912.8 27.05,952.17 66.42,952.17 578.23,952.17 1601.85,952.17 27.05,991.54 578.23,991.54 1601.85,991.54 27.05,1030.91 1326.26,1030.91 1365.63,1030.91 1601.85,1030.91 27.05,1070.28 66.42,1070.28 1247.52,1070.28 1601.85,1070.28 27.05,1109.65 1365.63,1109.65 1601.85,1109.65 27.05,1149.02 1601.85,1149.02 27.05,1188.39 1601.85,1188.39 27.05,1227.76 1601.85,1227.76 1265.15,1229.91 27.05,1267.13 1601.85,1267.13 1601.85,1306.5 135,1330 295,1340 1601.85,1345.87 1135,1385 1601.85,1385.24 1601.85,1424.61 1601.85,1463.98 342.01,1503.35 735.71,1503.35 1601.85,1503.35 342.01,1542.72 538.86,1542.72 735.71,1542.72 1601.85,1542.72 27.05,1582.09 1562.48,1582.09 1601.85,1582.09 27.05,1621.46 66.42,1621.46 105.79,1621.46 145.16,1621.46 184.53,1621.46 538.86,1621.46 578.23,1621.46 617.6,1621.46 656.97,1621.46 696.34,1621.46 735.71,1621.46 775.08,1621.46 814.45,1621.46 853.82,1621.46 893.19,1621.46 1168.78,1621.46 1208.15,1621.46 1326.26,1621.46 1523.11,1621.46 1562.48,1621.46 1601.85,1621.46 27.05,1660.83 66.42,1660.83 105.79,1660.83 145.16,1660.83 184.53,1660.83 223.9,1660.83 263.27,1660.83 302.64,1660.83 342.01,1660.83 381.38,1660.83 420.75,1660.83 460.12,1660.83 499.49,1660.83 538.86,1660.83 578.23,1660.83 617.6,1660.83 656.97,1660.83 696.34,1660.83 735.71,1660.83 775.08,1660.83 814.45,1660.83 853.82,1660.83 1208.15,1660.83 1562.48,1660.83 1601.85,1660.83 27.05,1700.2 66.42,1700.2 105.79,1700.2 145.16,1700.2 184.53,1700.2 223.9,1700.2 263.27,1700.2 302.64,1700.2 342.01,1700.2 381.38,1700.2 420.75,1700.2 460.12,1700.2 499.49,1700.2 538.86,1700.2 578.23,1700.2 617.6,1700.2 656.97,1700.2 696.34,1700.2 735.71,1700.2 775.08,1700.2 814.45,1700.2 853.82,1700.2 893.19,1700.2 932.56,1700.2 971.93,1700.2 1011.3,1700.2 1050.67,1700.2 1090.04,1700.2 1129.41,1700.2 1168.78,1700.2 1208.15,1700.2 1247.52,1700.2 1365.63,1700.2 1444.37,1700.2 1483.74,1700.2 1562.48,1700.2 1601.85,1700.2
  other v5: 1390,900 1435,910 1393.4,938.23
I2C1SCL: B3.42 P2.21 R10.1 | length 1276.9
  Top Layer w10: P2.21@495,235 495,323.19 R10.1 ; v2(545.11,550.11) 545,550.23 545,635 575,665 600,665 607.5,657.5 v2(642.5,657.5) v2@640,655 ; B3.42 725.47,1206.72 730.85,1201.34 v2(730.85,1197.28)
  Mid Layer 1 w10: P2.21@495,235 545,285 545,550 v2(545.11,550.11) ; v2(642.5,657.5) 685,700 685,1155 727.28,1197.28 v2(730.85,1197.28)
I2C1SDA: B3.43 P2.19 R11.1 | length 1175.8
  Top Layer w10: v2(584.45,635.55) 584.72,635.28 584.72,545.28 v2(585,545) ; R11.1 595,323.19 P2.19@595,235 ; v2(696.89,1205.78) 696.89,1205.95 705.79,1214.85 B3.43
  Mid Layer 1 w10: v2(584.45,635.55) 584.45,638.34 670,723.89 670,1175 696.89,1201.89 v2(696.89,1205.78) ; v2(585,545) 587.87,542.13 587.87,242.13 P2.19@595,235
I2C2SCL: B3.28 P2.17 R12.1 | length 1479.6
  Top Layer w10: v2(623.81,1088.78) 627.86,1088.78 643.45,1073.19 732.5,1073.19 786.81,1127.5 883.89,1127.5 894.66,1116.73 909.62,1116.73 921.55,1104.8 980,1104.8 B3.28 ; P2.17@695,235 700,240 R12.1
  Mid Layer 2 w10: v2(623.81,1088.78) 673.38,1039.2 685.8,1039.2 732.5,992.5 732.5,931.02 759.45,904.08 759.45,875.55 796.91,838.09 796.91,382.81 689.41,275.31 P2.17
I2C2SDA: B3.29 P2.15 R13.1 | length 1298.9
  Top Layer w10: P2.15@795,235 R13.1 ; v2(895.89,1154.23) 895.89,1152.24 924.55,1123.58 B3.29
  Mid Layer 2 w10: P2.15 829.96,264.37 829.96,469.96 870.89,510.89 870.89,599.11 811.91,658.09 811.91,848.09 780,880 780,904.74 760.43,924.31 760.43,1088.46 824.21,1152.24 893.9,1152.24 v2(895.89,1154.23)
NetB1_4: B1.4 R4.1 | length 187.6
  Bottom Layer w10: B1.4 105.32,876.5 R4.1
NetB1_9: B1.9 C2.1 Q2.1 | length 872.2
  Bottom Layer w10: B1.9 144.68,1115.32 200,1060 200,995 235,960 235,815 265,785 425,785 445,805 Q2.1@445,894.57 ; C2.1 395.43,872.56 411.49,888.62 439.05,888.62 Q2.1@445,894.57 ; Q2.1 465.55,915.12 Q2.1@445,894.57
NetB1_10: B1.10 C2.2 Q2.3 | length 408
  Bottom Layer w10: B1.10 164.37,1125.63 225,1065 225,1029.69 284.45,970.24 Q2.3 284.45,915.12 324.57,875 C2.2
NetB3_5: B3.5 C16.1 Y1.2 | length 522.5
  Top Layer w10: C16.1@445.45,585.89 470.45,585.89 541.34,515 615,515 643.94,543.94 Y1.2 686.1,587.17 B3.5
NetB3_6: B3.6 C17.2 Y1.1 | length 536.6
  Top Layer w10: B3.6 705.79,589.21 750,545 832.13,545 Y1.1 832.13,541.06 832.13,487.87 882.79,437.21 882.79,402.65 C17.2
NetC4_1: C4.1 R6.1 R8.2 U1.3 | length 916.8
  Top Layer w10: C4.1 1165,865.43 1165,956.81 1142.95,978.86 1142.95,987.13 R8.2@1128.27,1001.81 ; R6.1 R8.2@1128.27,1001.81 ; U1.3 1402.6,1334.44 1382.04,1355 1125,1355 1119.14,1349.14 1110.86,1349.14 1105,1343.28 1105,1103.86 1120,1088.86 R8.2 R8.2@1128.27,1001.81
NetC7_2: C7.2 L1.2 P1.16 U1.4 U1.5 | length 1874
  Top Layer w19.68: P1.16@790,1510 830,1470 866.56,1470 868.96,1472.4 1509.86,1472.4 1538.78,1443.48 1538.78,1431.04 1539.37,1430.45 1539.37,1304.52 1477.4,1242.55 U1.5 ; U1.4@1402.6,1206.08 U1.4 U1.5 ; L1.2 1247.34,1144 1280,1111.34 C7.2 1502.88,995.43 1531.26,1023.81 1531.26,1152.17 1477.4,1206.03 U1.5 ; L1.2 1262.66,1176.66 L1.2
NetD2_A: D2.A Q2.2 | length 831.8
  Mid Layer 2 w20: v4(970,1350) v4(1040,1350)
  Bottom Layer w20: Q2.2 402.81,1226.39 511.39,1226.39 585,1300 805,1300 854.68,1349.68 969.68,1349.68 v4(970,1350) ; D2.A 1039.31,1259.39 1039.31,1349.31 v4(1040,1350)
NetD4_A: D4.A L1.1 U1.1 | length 616.3
  Top Layer w10: L1.1 1237.5,1296 L1.1@1275,1258.5 ; L1.1@1315.63,1274.37 1325,1265 1440.66,1265 1477.4,1301.74 U1.1
  Top Layer w19.68: L1.1@1237.5,1296 1296,1296 1316.63,1275.37 1326,1266 1357,1235 1360,1235 1360,1170.04 1403.43,1126.61 1403.43,1110.28 1438.66,1075.04 D4.A
NetR7_1: R7.1 R9.2 U2.5 | length 172.2
  Bottom Layer w20: R7.1 1506.24,1317.38 1506.24,1152.62 U2.5
NRESET: B3.7 C18.2 P1.10 | length 1083.3
  Top Layer w10: B3.7 725.47,744.62 v3(747,723.09) 747,702.57 C18.2
  Mid Layer 2 w10: P1.10 533.94,1478.5 533.94,1368.94 490,1325 490,1152.31 492.93,1149.38 648.24,994.07 648.24,917.03 747,818.27 v3(747,723.09)
PA1: B3.15 P2.13 | length 722.7
  Top Layer w10: B3.15 882.95,853.89 895,865.94 v2(895,870)
  Mid Layer 2 w10: P2.13 889.41,237.09 905,252.68 905,856.64 895,866.64 v2(895,870)
PA4: B3.20 P2.11 | length 939.4
  Top Layer w10: v2(907.08,902.85) 909.95,905.72 909.95,914.34 942.03,946.42 B3.20
  Mid Layer 1 w10: v2(907.08,902.85) 934.93,875 998.28,875 1021.56,851.72 1021.56,847.33 1044.84,824.05 1044.84,764.71 1004.14,724.01 1004.14,561.39 1036.14,529.39 1036.14,469.44 1004.14,437.43 1004.14,364.54 1036.14,332.54 1036.14,272.59 1021.59,258.03 1010,258.03 1004.14,252.18 1004.14,251.83 995,242.68 P2.11@995,235
PA5: B3.21 P2.9 | length 1063.2
  Top Layer w10: v2(885,930) 921.1,966.1 B3.21
  Mid Layer 1 w10: v2(885,930) 928.22,973.22 1071.52,973.22 1089.41,955.33 1089.41,240.59 P2.9@1095,235
PA6: B3.22 P2.7 | length 1171.8
  Top Layer w10: v2(870,965) 890.79,985.79 B3.22
  Mid Layer 1 w10: v2(870,965) 912.64,1007.64 1087.36,1007.64 1195,900 P2.7@1195,235
PA7: B3.23 P2.5 | length 1032.6
  Top Layer w10: B3.23 1054.34,1005.47 1070.74,1021.87 1070.74,1030.37 1090,1049.64 v2(1090,1050)
  Mid Layer 1 w10: v2(1090,1050) 1289.41,850.59 1289.41,240.59 P2.5@1295,235
PA8: B3.41 P2.3 | length 1537.7
  Top Layer w10: B3.41 746.06,1260 746.06,1228.94 765,1210 765,1190.71 759.45,1185.16 v2(759.45,1145.55)
  Mid Layer 1 w10: v2(759.45,1145.55) 818.89,1205 869.89,1205 v2(869.96,1205.07)
  Mid Layer 2 w10: v2(869.96,1205.07) 870.03,1205 897.5,1205 902.5,1210 914.9,1210 989.9,1135 1085,1135 1370,850 1370,355 1395,330 P2.3@1395,235
PA11: B3.44 P2.1 | length 1929.4
  Top Layer w10: v2@527.87,1297.87 v2(525,1295) 560,1295 570,1305 675,1305 685.2,1294.8 685.2,1261.81 B3.44
  Mid Layer 2 w10: v2(525,1295) 550,1270 876.11,1270 958.61,1187.5 983.61,1187.5 1021.11,1150 1100,1150 1489.41,760.59 P2.1
PA12: B3.45 P1.29 U2.1 | length 1915.4
  Top Layer w10: B3.45 666.42,1178.16 v2(732.5,1112.08)
  Mid Layer 1 w10: v2(732.5,1112.08) 733.19,1111.39 766.39,1111.39 784.43,1129.43 828.75,1173.75 876.52,1173.75 884.5,1181.73 885.51,1181.73 897.52,1193.75 897.52,1258.96 887.5,1268.98 887.5,1335.42 942.07,1389.99 945,1392.92 945,1419.79 cw(c989.41,1423.03) 945,1426.27 945,1441.59 973.41,1470 1430,1470 1432.93,1467.07 P1.29@1483.19,1416.81
  Bottom Layer w20: U2.1 1241.14,1146.06 1312.2,1075 1515,1075 1550,1110 1550,1363.28 1538.28,1375 1520.57,1375 1490,1405.57 P1.29@1490,1410
PB0: B3.25 P1.27 | length 649.3
  Top Layer w10: B3.25 981.81,1045.75 1019.42,1045.75 1038.1,1064.43 v2(1039.63,1064.43)
  Mid Layer 1 w10: v2(1039.63,1064.43) 1043.69,1064.43 1059.26,1080 1190,1080 1330,1220 1330,1363.62 P1.27
PB1: B3.26 P1.25 | length 676.6
  Top Layer w10: v2(872.92,1054.31) 911.81,1054.31 922.03,1064.53 B3.26
  Mid Layer 1 w10: v2(872.92,1054.31) 920.69,1054.31 1276.38,1410 P1.25@1290,1410
PB2: B3.27 P1.23 | length 526.4
  Top Layer w10: v2(898.23,1089.23) 902.29,1089.23 907.3,1084.21 B3.27
  Mid Layer 1 w10: v2(898.23,1089.23) 1183.44,1374.44 1183.44,1403.44 P1.23@1190,1410
PB12: B3.33 P1.21 | length 301.6
  Top Layer w10: B3.33 924.09,1260.91 v2(945,1240)
  Mid Layer 1 w10: v2(945,1240) 990,1285 1025,1285 1090,1350 P1.21@1090,1410
PB13: B3.34 P1.19 | length 211.9
  Top Layer w10: B3.34 882.95,1334.52 949.05,1400.61 980.61,1400.61 P1.19@990,1410
PB14: B3.35 P1.17 | length 161.2
  Top Layer w10: B3.35 863.27,1384.99 888.27,1410 P1.17@890,1410
PB15: B3.36 P1.15 | length 171.3
  Top Layer w10: P1.15@790,1410 843.58,1356.42 B3.36
PC4: B3.24 P1.13 | length 987.5
  Top Layer w10: v2(870,895) 830,935 830,1015.52 841.29,1026.81 876.03,1026.81 881.46,1021.38 954,1021.38 957.78,1025.16 B3.24
  Mid Layer 1 w10: P1.13@690,1410 785,1315 785,1210 705,1130 705,1000 810,895 v2(870,895)
PC6: B3.37 P1.11 | length 322.3
  Top Layer w10: P1.11@590,1410 634.53,1365.47 764.89,1365.47 823.9,1306.47 B3.37
PC7: B3.38 P1.9 | length 401.8
  Top Layer w10: P1.9@490,1410 491.32,1410 550.84,1350.47 758.68,1350.47 804.21,1304.94 B3.38
PC8: B3.39 P1.7 | length 474.4
  Top Layer w10: P1.7@390,1410 439.09,1360.91 519.19,1360.91 544.63,1335.47 740.89,1335.47 783.62,1292.74 783.62,1261.81 B3.39
PC9: B3.40 P1.5 | length 553.8
  Top Layer w10: P1.5@290,1410 298.69,1401.31 323.69,1401.31 379.09,1345.91 512.98,1345.91 538.42,1320.47 734.67,1320.47 763.94,1291.21 763.94,1261.81 B3.40
PC10: B3.51 P1.3 | length 704.2
  Top Layer w10: B3.51 529.55,1142.81 577.11,1142.81 594.37,1125.55 594.37,1116.59 v2(597.24,1113.72)
  Mid Layer 1 w10: P1.3@190,1410 190,1353.36 175,1338.36 175,1295 281.07,1188.93 474.59,1188.93 494.98,1168.54 542.42,1168.54 v2(597.24,1113.72)
PC11: B3.52 P1.1 | length 942.4
  Top Layer w10: v2(420,1050) 492.68,1122.68 528.19,1122.68 B3.52
  Mid Layer 1 w10: P1.1@90,1410 75,1395 75,1310 211.53,1173.47 468.84,1173.47 510,1132.31 510,1055 482.5,1027.5 442.5,1027.5 v2(420,1050)
SWCLK: B3.49 P1.4 | length 791.6
  Top Layer w10: B3.49 576.17,1182.64 640.36,1118.45 v2(642.5,1118.45)
  Mid Layer 1 w10: P1.4@190,1510 240,1460 240,1397.03 267.03,1370 325,1370 511.46,1183.54 577.4,1183.54 v2(642.5,1118.45)
SWDIO: B3.46 P1.8 | length 537.1
  Top Layer w10: v2(543.35,1211.04) 547.41,1211.04 559.91,1198.54 581.48,1198.54 590.76,1189.26 613.69,1189.26 613.97,1188.97 623.97,1188.97 646.73,1211.73 B3.46
  Mid Layer 1 w10: P1.8@390,1510 440,1460 440,1314.39 v2(543.35,1211.04) ; v2@545,1210 v2@548.45,1210
UART1RX: B3.58 P2.27 | length 990.4
  Top Layer w10: v2(412.93,1015) 416.76,1015 426.29,1005.47 468.25,1005.47 B3.58
  Mid Layer 1 w10: P2.27@195,235 195,305 250,360 250,852.07 v2(412.93,1015)
UART1TX: B3.57 P2.29 | length 1152.4
  Top Layer w10: v2(470,1055) 472.01,1052.99 472.01,1037.05 483.9,1025.16 B3.57
  Mid Layer 1 w10: P2.29@95,235 95,248.27 108.99,262.26 108.99,263.99 145,300 145,315 230,400 230,930 389.85,1089.85 435.15,1089.85 v2(470,1055)
UART2RX: B3.16 P2.23 | length 1005.3
  Top Layer w10: B3.16 925.91,809.09 v2(961.95,773.05)
  Mid Layer 1 w10: P2.23@395,235 395,370 460,435 460,530 523.05,593.05 604.27,593.05 626.21,615 815,615 955,755 955,762.05 961.95,769 v2(961.95,773.05)
UART2TX: B3.17 P2.25 | length 1087.5
  Top Layer w10: B3.17 980.91,853.15 990,844.06 v2(990,840)
  Mid Layer 1 w10: P2.25@295,235 295,295 437.5,437.5 437.5,532.5 513.05,608.05 598.05,608.05 620,630 780,630 v2(990,840)
V_Bat: B1.7 BAT.1 C3.2 D2.C Mano_test.3 P1.20 | length 2740.6
  Top Layer w20: v3(915,1660) 917.71,1660 930.05,1647.65 972.35,1647.65 BAT.1
  Mid Layer 2 w10: v3(915,1660) 989.41,1585.59 P1.20
  Mid Layer 2 w20: v4(799.94,1090.06) 840.82,1049.18 840.82,1025.08 864.92,1000.98 v4(864.92,1000)
  Bottom Layer w10: B1.7 105.32,1262.34 236.19,1393.22 236.19,1397.36 236.19,1397.86 cw(c520.99,1426.57) 234.75,1425.23 cw(c279.28,1425.33) 235,1430 ccw(c225.05,1431) 235.05,1431 235.05,1450.05 254.93,1469.93 286.46,1469.93 cw(c287.64,1460) 287.64,1470 950,1470 P1.20@990,1510
  Bottom Layer w20: v4(799.94,1090.06) 799.94,1091.04 815.55,1106.65 815.55,1199.45 Mano_test.3 ; v4(864.92,1000) 1010,1000 D2.C D2.C@1046.34,980 ; P1.20@990,1510 1027.44,1472.56 1209.92,1472.56 1238.94,1443.55 1238.94,1431.11 1239.53,1430.51 1239.53,1301.85 1210,1272.32 v6(1210,1220) 1209.04,1219.04 1209.04,1194.04 1190,1175 1190,1095 1106.96,1011.96 1078.3,1011.96 D2.C@1046.34,980 ; C3.2 1062.36,963.98 D2.C@1046.34,980
pads on no net: B1.3 B2.5 B2.6 B2.7 B2.8 B3.2 B3.3 B3.4 B3.8 B3.9 B3.10 B3.11 B3.14 B3.30 B3.50 B3.53 B3.54 B3.55 B3.56 B3.60 B3.61 B3.62 J1.A5 J1.B5 P2.2 P2.4 P2.6 P2.8 P2.10 P2.12 P2.14 P2.16 P2.18 P2.20 P2.22 P2.24 P2.26 P2.28 P2.30

## Polygon pours and split planes (outlines as drawn)
GND on Top Layer "GND_TOP_LAYER" (solid, remove dead copper, pour order 0): 1.46,-1.65 1.46,1770 1655,1770 1655,-1.65
GND on Mid Layer 1 "GND_MIDDLE_1" (solid, remove dead copper, pour order 1): 1.46,-1.65 1.46,1770 1655,1770 1655,-1.65
GND on Mid Layer 2 "GND_MIDDLE_2" (solid, remove dead copper, pour order 2): 1.46,-1.65 1.46,1770 1655,1770 1655,-1.65
GND on Bottom Layer "GND_BOTTOM_LAYER" (solid, remove dead copper, pour order 3): 1.46,-1.65 1.46,1770 1655,1770 1655,-1.65

## Keep-outs
Keep-Out Layer:
  the board outline again, w10

## Silkscreen, mask and mechanical layers (free items; w line width, h text height)
Top Overlay:
  text "Pet Tracker" at 70,1615 h60

## Text inside footprints (layer, text, board x,y; h text height)
Y1: Mechanical 13 "*" at 1180,1336.5 h50 r270